# Altium PCB CEM3340.PcbDoc
Units mil, origin at the board's own origin, x right, y up, seen from the top; angles counter-clockwise.
Board outline 8400 x 5545 mil, 2 copper layers (Top Layer, Bottom Layer), stack 61.811 mil thick; 21 components, 22 nets, 63 pads, 9 vias.
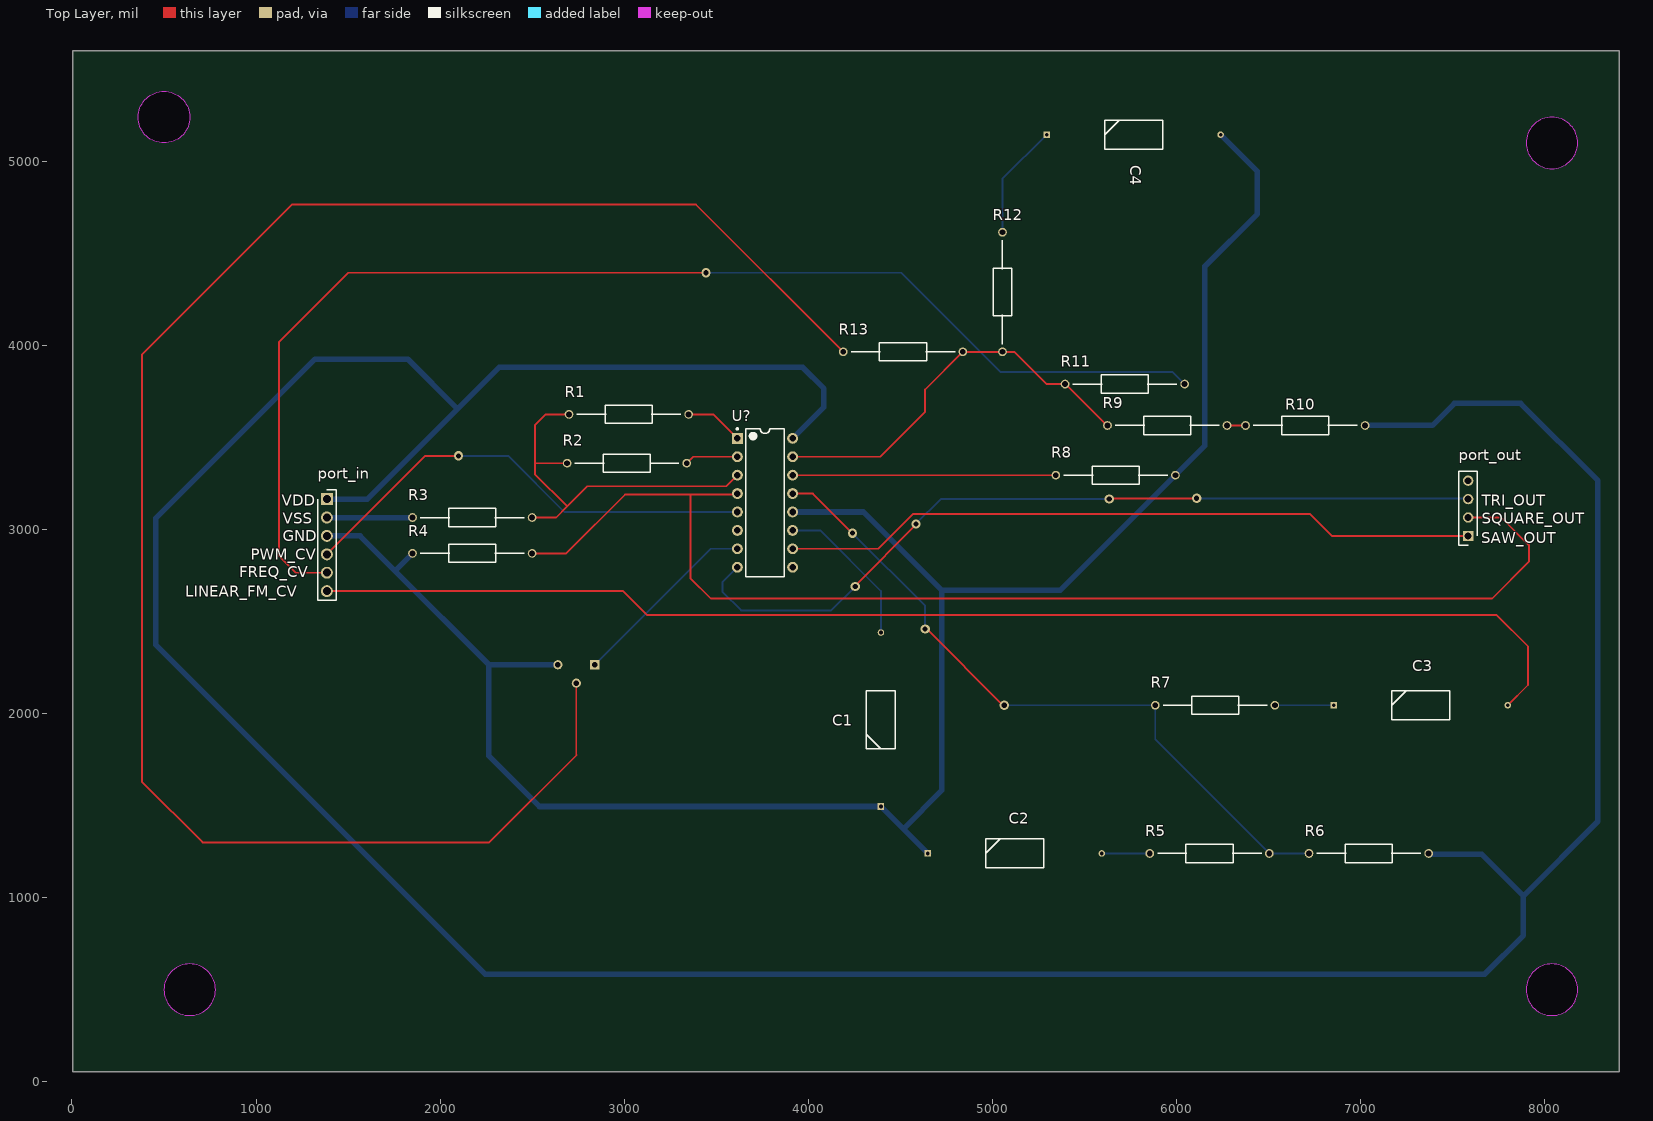
[diagram p0: Top Layer view]
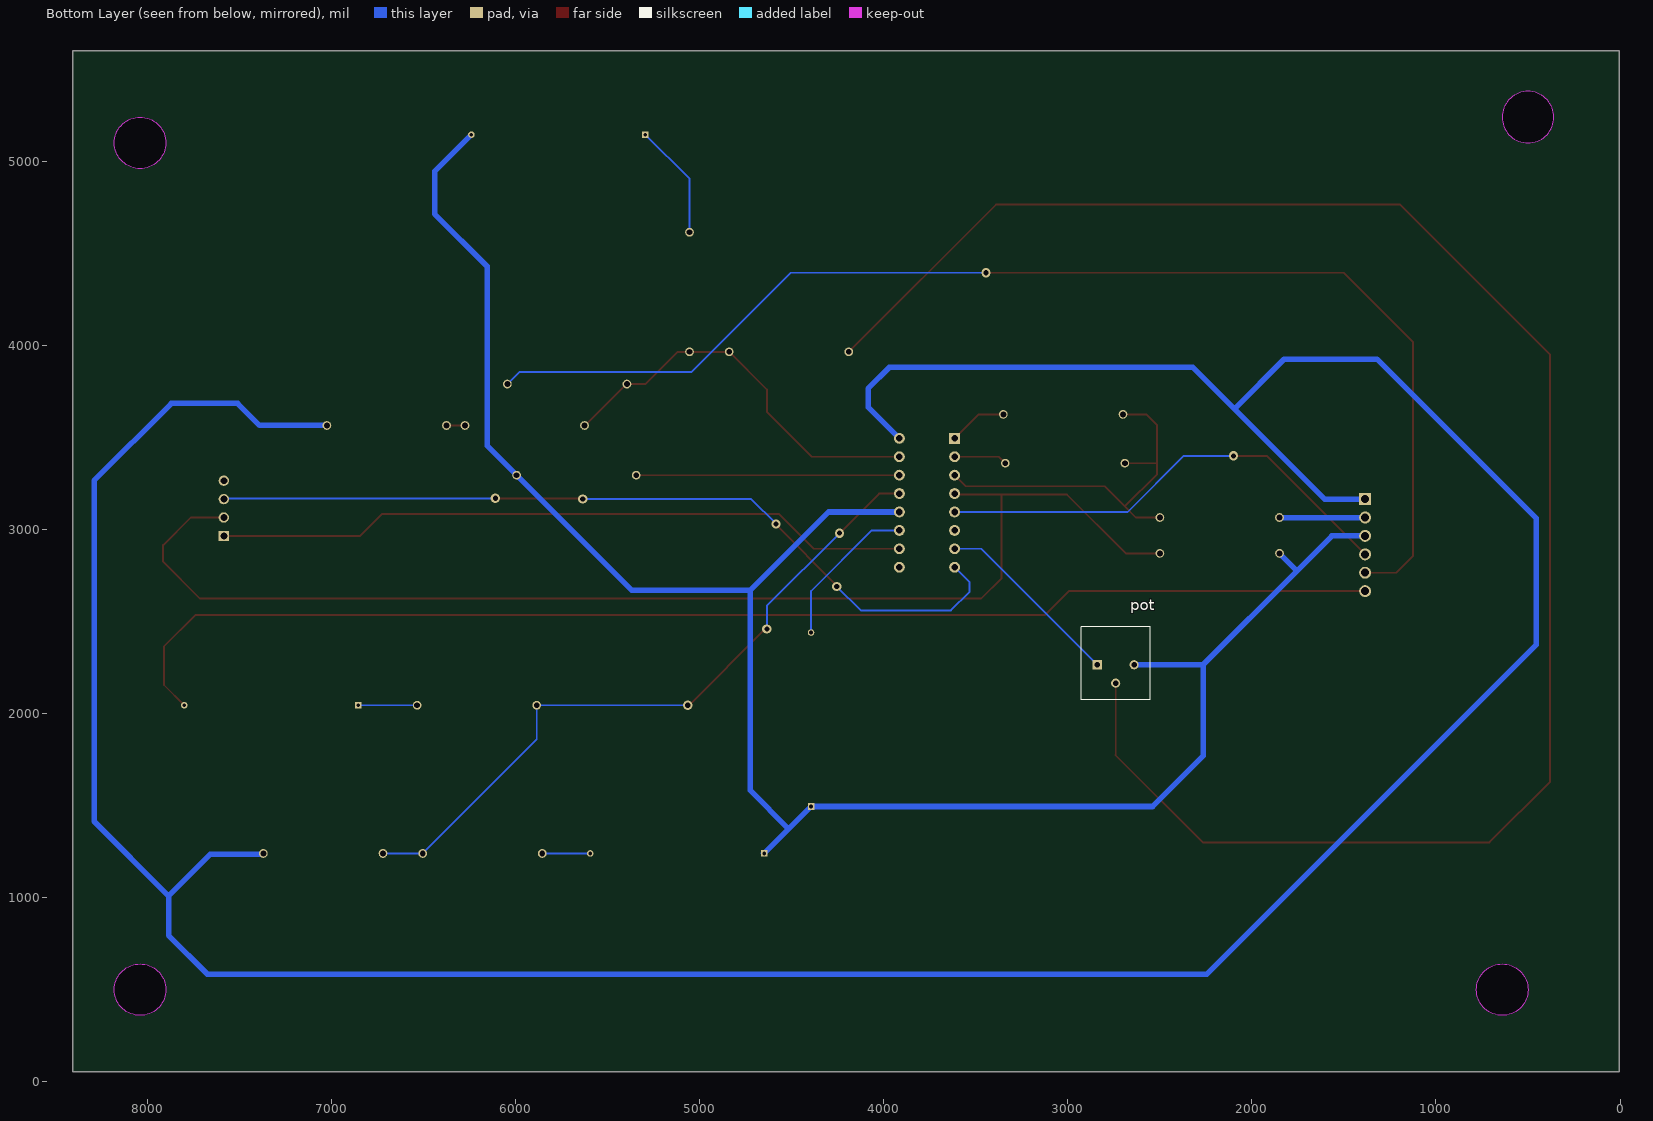
[diagram p1: Bottom Layer view, seen from below]
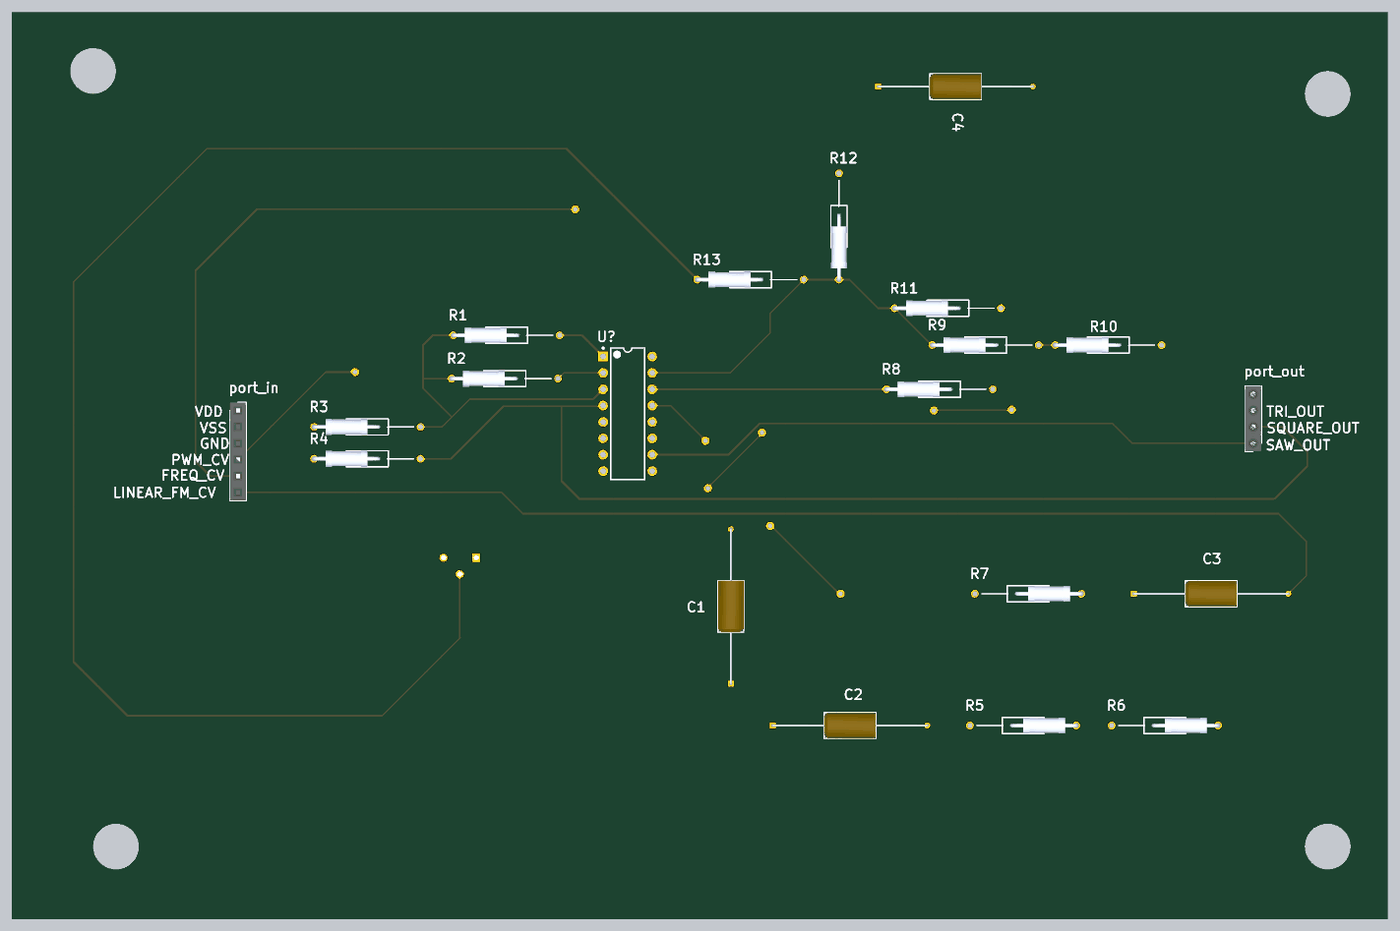
[diagram p2: 3D render of the assembled board from above, using the file's embedded part models]

## Layer stack, top to bottom
Top Solder: solder mask 0.5, Solder Resist, Dk 3.5
Top Layer: signal copper 1.378
Dielectric 1: dielectric 59.055, FR-4, Dk 4.5
Bottom Layer: signal copper 1.378
Bottom Solder: solder mask 0.5, Solder Resist, Dk 3.5

## Board outline
5,55 5,5600 8405,5600 8405,55
cut-out: 7900,500 ccw(c8040,500) 8040,360 ccw(c8040,500) 8180,500 ccw(c8040,500) 8040,640 ccw(c8040,500)
cut-out: 7900,5100 ccw(c8040,5100) 8040,4960 ccw(c8040,5100) 8180,5100 ccw(c8040,5100) 8040,5240 ccw(c8040,5100)
cut-out: 500,5100 cw(c500,5240) 360,5240 cw(c500,5240) 500,5380 cw(c500,5240) 640,5240 cw(c500,5240)
cut-out: 500,500 ccw(c640,500) 640,360 ccw(c640,500) 780,500 ccw(c640,500) 640,640 ccw(c640,500)

## Design rules (kind name [scope] priority, off if disabled: settings)
Clearance [All] p1: gap=10 ignorepadtopadclearanceinfootprint=FALSE
PolygonConnect [All] p1: connectstyle=Relief reliefconductorwidth=10 reliefentries=4 polygonreliefangle="90 Angle" airgapwidth=10
RoutingVias [All] p1: holewidth=28 width=50 viastyle="Through Hole" minholewidth=28 minwidth=50 maxholewidth=28 maxwidth=50
SolderMaskExpansion [All] p1: expansion=4 istentingtop=FALSE
SupplyNets "Schematic Supply Nets_2" [InNet('VDD')] p1: voltage=0.000
SupplyNets "Schematic Supply Nets_1" [InNet('GND')] p2: voltage=0.000
SupplyNets "Schematic Supply Nets" [InNet('VSS')] p3: voltage=0.000
Width [All] p1: maxlimit=30 minlimit=10 preferedwidth=10 minimp=50.000000 maximp=50.000000 favimp=50.000000
30 further rules are at their usual default settings.

## Classes and differential pairs
net class U?_Nets: GND NetC1_2 Netport_in_4 Netport_out_1 Netport_out_2 Netport_out_3 Netpot_1 NetR1_1 NetR1_2 NetR2_2 NetR5_1 NetR8_1 NetR9_1 NetU?_6 NetU?_9 VDD
net class R13_Nets: Netpot_2 NetR9_1
net class R12_Nets: NetC4_1 NetR9_1
net class R11_Nets: Netport_in_5 NetR9_1
net class R10_Nets: NetR9_2 VDD
net class R9_Nets: NetR9_1 NetR9_2
net class R8_Nets: GND NetR8_1
net class R7_Nets: NetC3_1 NetR5_1
net class R6_Nets: NetR5_1 VDD
net class R5_Nets: NetC2_2 NetR5_1
net class R4_Nets: GND Netport_out_2
net class R3_Nets: NetR1_1 VSS
net class R2_Nets: NetR1_1 NetR2_2
net class R1_Nets: NetR1_1 NetR1_2
net class pot_Nets: GND Netpot_1 Netpot_2
net class port_out_Nets: Netport_out_1 Netport_out_2 Netport_out_3 Netport_out_4
net class port_in_Nets: GND NetC3_2 Netport_in_4 Netport_in_5 VDD VSS
net class C4_Nets: GND NetC4_1
net class C3_Nets: NetC3_1 NetC3_2
net class C2_Nets: GND NetC2_2
net class C1_Nets: GND NetC1_2

## Components (designator, comment, footprint, x,y, rotation, side; value= is the part's Value field where it differs from the comment)
C1 "1000p" CAPPA2400W30L800D400 4395,1495.12 r90 top
C2 "0.01u" CAPPA2400W30L800D400 4650,1240 r0 top
C3 "0.1u" CAPPA2400W30L800D400 6855,2045 r0 top
C4 "0.01u" CAPPA2400W30L800D400 5295.12,5145 r0 top
port_in "929870-01-06-RA" RHDR6W64P0X254_1X6_1524X254X380P 1385,3165 r270 top
port_out "929870-01-04-RA" RHDR4W76P0X254_1X4_1016X254X826P 7585,2965 r90 top
pot "20k" 3296P1502LF 2840,2265 r0 bottom
R1 "30k" RESAD1650W60L650D250 2700.39,3625 r0 top
R2 "5.6k" RESAD1650W60L650D250 2690,3360 r0 top
R3 "830" RESAD1650W60L650D250 1850,3065 r0 top
R4 "10k" RESAD1650W60L650D250 1850,2870 r0 top
R5 "470" RESAD1650W60L650D250 6504.61,1240 r180 top
R6 "1.5M" RESAD1650W60L650D250 7370,1240 r180 top
R7 "1M" RESAD1650W60L650D250 6535,2045 r180 top
R8 "1.8k" RESAD1650W60L650D250 5345,3295 r0 top
R9 "310k" RESAD1650W60L650D250 5625.39,3565 r0 top
R10 "60k" RESAD1650W60L650D250 6375.39,3565 r0 top
R11 "100k" RESAD1650W60L650D250 5395,3790 r0 top
R12 "470" RESAD1650W60L650D250 5055,3965 r90 top
R13 "1M" RESAD1650W60L650D250 4190,3965 r0 top
U? "ADG508AKNZ" ADI-N-16 3765,3145 r0 top

## Footprints (in the part's own frame and the unit in brackets; to place one, negate y for a bottom-side part, rotate by r counter-clockwise, add the part's x,y. Pads: shape width x height; smd on the part's side, far side on the other; paste and mask are expansions set on the pad)
3296P1502LF [mm]
  rect 1.269x1.269 hole 0.74: 1(0,0)
  round 1.269 hole 0.74: 2(-2.54,2.54) 3(-5.08,0)
  silkscreen extent -7.3,-5.23 2.22,4.8, body extent -7.08,-5.26 2.45,6.29, height 3.88
ADI-N-16 [mm] "DIP, 16-Leads, Body 20.07x6.6mm, Pitch 2.54mm"
  rect 1.5x1.5 hole 0.9: 1(-3.81,8.89)
  round 1.5 hole 0.9: 2(-3.81,6.35) 3(-3.81,3.81) 4(-3.81,1.27) 5(-3.81,-1.27) 6(-3.81,-3.81) 7(-3.81,-6.35) 8(-3.81,-8.89) 9(3.81,-8.89) 10(3.81,-6.35) 11(3.81,-3.81) 12(3.81,-1.27) 13(3.81,1.27) 14(3.81,3.81) 15(3.81,6.35) 16(3.81,8.89)
  silkscreen extent -3.93,-10.2 2.65,10.31, body extent -3.95,-10.15 3.95,10.15, height 5.33
CAPPA2400W30L800D400 [mm]
  rect 0.9x0.9 hole 0.5: 1(0,0)
  round 0.9 hole 0.5: 2(24,0)
  silkscreen extent 8,-2 16,2, body extent -0.15,-2 24.15,2, height 3.99
RESAD1650W60L650D250 [mm]
  round 1.2 hole 0.8: 1(0,0) 2(16.5,0)
  silkscreen extent 1.08,-1.25 15.42,1.25, body extent -0.3,-1.25 10.3,1.25, height 2.55
RHDR4W76P0X254_1X4_1016X254X826P [mm]
  rect 1.425x1.425 hole 0.95: 1(0,0)
  round 1.425 hole 0.95: 2(2.54,0) 3(5.08,0) 4(7.62,0)
  silkscreen extent -1.27,-1.27 8.89,1.27, body extent -1.27,-1.27 8.89,1.27, height 8.26
RHDR6W64P0X254_1X6_1524X254X380P [mm]
  rect 1.65x1.65 hole 1.1: 1(0,0)
  round 1.65 hole 1.1: 2(2.54,0) 3(5.08,0) 4(7.62,0) 5(10.16,0) 6(12.7,0)
  silkscreen extent -1.27,-1.27 13.97,1.27, body extent -1.27,-1.27 13.97,1.27, height 3.8

## Part data
C1 C2 C3 C4: library part 0113207, "Capacitor", Manufacturer_Name="RS Pro", Datasheet Link=https://docs.rs-online.com/d68c/0900766b8157e121.pdf, Manufacturer_Part_Number=0113207
port_in: "Connector", Manufacturer_Name=3M, Mouser Part Number=517-929870-01-06-RA, Arrow Part Number=929870-01-06-RA, Arrow Price/Stock=https://www.arrow.com/en/products/929870-01-06-ra/3m?region=nac, Datasheet Link=https://componentsearchengine.com/Datasheets/1/929870-01-06-RA.pdf, Height=3.8mm, Manufacturer_Part_Number=929870-01-06-RA, Mouser Price/Stock=https://www.mouser.co.uk/ProductDetail/3M-Electronic-Solutions-Division/929870-01-06-RA?qs=neFkstNq%252B6F6Q7pF8hOFFA%3D%3D
port_out: "Connector", Manufacturer_Name=3M, Mouser Part Number=517-929870-01-04-RA, Arrow Part Number=929870-01-04-RA, Arrow Price/Stock=https://www.arrow.com/en/products/929870-01-04-ra/3m, Datasheet Link=https://componentsearchengine.com/Datasheets/2/929870-01-04-RA.pdf, Height=8.26mm, Manufacturer_Part_Number=929870-01-04-RA, Mouser Price/Stock=https://www.mouser.co.uk/ProductDetail/3M-Electronic-Solutions-Division/929870-01-04-RA?qs=neFkstNq%252B6GPZEKactAgTg%3D%3D
pot: library part 3296P-1-203LF, "Variable Resistor", Manufacturer_Name=Bourns, Mouser Part Number=652-3296P-1-203LF, Arrow Part Number=3296P-1-203LF, Arrow Price/Stock=https://www.arrow.com/en/products/3296p-1-203lf/bourns?region=nac, Datasheet Link=https://www.bourns.com/pdfs/3296.pdf, Height=4.96mm, Manufacturer_Part_Number=3296P-1-203LF, Mouser Price/Stock=https://www.mouser.co.uk/ProductDetail/Bourns/3296P-1-203LF?qs=2EY8XwU7iu%2FBEM7pUMj5aA%3D%3D
R1 R2 R3 R4 R5 R6 R7 R8 R9 R10 R11 R12 R13: library part MRS25000C1003FC100, "Resistor", Manufacturer_Name=Vishay, Mouser Part Number=594-MRS25000C1003FC1, Arrow Part Number=MRS25000C1003FC100, Arrow Price/Stock=https://www.arrow.com/en/products/mrs25000c1003fc100/vishay?region=nac, Datasheet Link=http://www.vishay.com/docs/28724/mrs16m25.pdf, Manufacturer_Part_Number=MRS25000C1003FC100, Mouser Price/Stock=https://www.mouser.co.uk/ProductDetail/Vishay-BC-Components/MRS25000C1003FC100?qs=H30XFsNYD%2FHyk6mBpuomxg%3D%3D
U?: library part CMP-0793-00029-1, "CMOS 8-Channel Analog Multiplexer, 280 Ohm / 500 Ohm Ron, 16-pin DIP (N-16), Tube", Manufacturer="Analog Devices", Code_JEDEC=MS-001, ComponentLink1Description="Manufacturer URL", ComponentLink1URL=http://www.analog.com/en/index.html, ComponentLink2Description=Datasheet, ComponentLink2URL=http://www.analog.com/static/imported-files/data_sheets/ADG508A_509A.pdf, ComponentLink3Description="Package Specification", ComponentLink3URL=http://www.analog.com/static/imported-files/packages/44768431550332N_16.pdf, DatasheetVersion="Rev. D", Max Analog Signal Range="Vss to Vdd", Mounting Technology="Through Hole", PackageDescription="16-Pin Plastic Dual In-Line Package, Row spacing 7.62 mm, Pitch 2.54 mm", PackageReference=N-16, PackageVersion="070706-A, 07/2006", Packing=Tube, PartNumber=ADG508AKNZ, Ron (ohms)=280, t transition (s)=200n

## Via types
v1: diameter 50, hole 28, Top Layer to Bottom Layer, 9 vias

## Nets (pads, with @x,y where several pads share a name; then routed paths per layer and width w, separated by ;. In a path a pad name is that pad's centre, name@x,y a point inside that pad or via, vN(x,y) a via of type N, cw(c..) or ccw(c..) an arc to the next point about the centre after c; other vN are vias at no path point)
GND: C1.1 C2.1 C4.2 port_in.3 pot.3 R4.1 R8.2 U?.12 | length 10812.8
  Bottom Layer w10: 1752.5,2777.5 1757.5,2777.5 ; 4516.2,1373.8 4516.2,1373.92 ; C2.1@4652.4,1252.72 C2.1@4665.12,1240
  Bottom Layer w30: port_in.3 1565,2965 1752.5,2777.5 2265,2265 ; 1757.5,2777.5 R4.1 ; pot.3 2265,2265 ; U?.12 4300,3095 4725,2670 ; 4516.2,1373.8 C2.1 ; C4.2 6440,4945 6440,4715 6155,4430 6155,3455.39 R8.2 5369.61,2670 4725,2670 ; 2265,2265 2265,1770 2539.88,1495.12 C1.1 4516.2,1373.92 4725,1582.72 4725,2670
NetC1_2: C1.2 U?.11 | length 841.7
  Bottom Layer w10: U?.11 4065,2995 4395,2665 C1.2
NetC2_2: C2.2 R5.2 | length 245
  Bottom Layer w10: C2.2@5610,1240 R5.2
NetC3_1: C3.1 R7.1 | length 320
  Bottom Layer w10: R7.1 C3.1
NetC3_2: C3.2 port_in.6 | length 7014.9
  Top Layer w10: port_in.6 2995,2665 3125,2535 3255,2535 7740,2535 7910,2365 7910,2155.12 C3.2
NetC4_1: C4.1 R12.2 | length 629.9
  Bottom Layer w10: R12.2 5055,4904.88 C4.1
Netport_in_4: port_in.4 U?.5 | length 2577.9
  Top Layer w10: port_in.4 1920,3400 v1(2100,3400)
  Bottom Layer w10: v1(2100,3400) 2370,3400 2675,3095 U?.5
Netport_in_5: port_in.5 R11.2 | length 6787.8
  Top Layer w10: port_in.5 1215,2765 1125,2855 1125,4020 1500,4395 3444.09,4395 v1(3444.72,4394.38)
  Bottom Layer w10: v1(3444.72,4394.38) 4505.62,4394.38 5045,3855 5979.61,3855 R11.2
Netport_out_1: port_out.1 U?.10 | length 3798.4
  Top Layer w10: U?.10 4380,2895 4570,3085 6725,3085 6845,2965 port_out.1
Netport_out_2: port_out.2 R4.2 U?.4 | length 6870.6
  Top Layer w10: R4.2 2685,2870 3005,3190 3360,3190 ; U?.4 3610,3190 3360,3190 ; port_out.2 7765,3065 7915,2915 7915,2825 7715,2625 3470,2625 3360,2735 3360,3190
Netport_out_3: port_out.3 U?.8 | length 4520.2
  Top Layer w10: v1(4255,2690) 4255,2695 4585,3025 v1(4585,3030) ; v1(5635,3165) 5637.5,3167.5 6107.5,3167.5 v1(6110,3170)
  Bottom Layer w10: U?.8 3535,2715 3535,2660 3635,2560 4125,2560 v1(4255,2690) ; v1(4585,3030) 4720,3165 v1(5635,3165) ; v1(6110,3170) 6112.5,3167.5 7582.5,3167.5 port_out.3
Netpot_1: pot.1 U?.7 | length 1036
  Bottom Layer w10: pot.1 3470,2895 U?.7
Netpot_2: pot.2 R13.1 | length 9884.1
  Top Layer w10: pot.2 2740,1775 2740.86,1774.14 2266.72,1300 710,1300 380,1630 380,3950 1195,4765 3390,4765 R13.1
NetR1_1: R1.1 R2.1 R3.2 U?.3 | length 2115.3
  Top Layer w10: R3.2 2630,3065 2690,3125 ; R2.1 2515,3360 ; R1.1@2707.33,3625 2575,3625 2515,3565 2515,3360 ; U?.3 3555,3235 2800,3235 2690,3125 ; 2515,3360 2515,3300 2690,3125
NetR1_2: R1.2 U?.1 | length 318.8
  Top Layer w10: R1.2 3485,3625 U?.1
NetR2_2: R2.2 U?.2 | length 289.9
  Top Layer w10: R2.2 3374.61,3395 U?.2
NetR5_1: R5.1 R6.2 R7.2 U?.13 | length 3797.2
  Top Layer w10: U?.13 4025,3195 v1(4240,2980) ; v1(4635,2460) 4642.5,2460 5057.5,2045 v1(5065,2045)
  Bottom Layer w10: v1(4240,2980) 4635,2585 v1(4635,2460) ; v1(5065,2045) R7.2 5885.39,1859.21 R5.1 R6.2
NetR8_1: R8.1 U?.14 | length 1430
  Top Layer w10: U?.14 R8.1
NetR9_1: R9.1 R11.1 R12.1 R13.2 U?.15 | length 2182.7
  Top Layer w10: U?.15 4390,3395 4635,3640 4635,3760.39 R13.2 R12.1 5120,3965 5295,3790 R11.1 5397.7,3790 5622.7,3565 R9.1
NetR9_2: R9.2 R10.1 | length 100.4
  Top Layer w10: R9.2 R10.1
VDD: port_in.1 R6.1 R10.2 U?.16 | length 19185.2
  Bottom Layer w10: 1842.5,3412.5 1852.5,3412.5 ; R6.1 R6.1@7375,1235
  Bottom Layer w30: port_in.1 1605,3165 1852.5,3412.5 2095,3655 ; U?.16 4085,3665 4085,3765 3970,3880 2320,3880 2095,3655 ; R10.2 7390,3565 7510,3685 7870,3685 8290,3265 8290,1415 7885,1010 ; R6.1@7375,1235 7660,1235 7885,1010 ; 2095,3655 1824.14,3925.86 1320.86,3925.86 455,3060 455,2375 2245,585 7675,585 7885,795 7885,1010
VSS: port_in.2 R3.1 | length 465
  Bottom Layer w30: port_in.2 R3.1
pads on no net: port_out.4 U?.6 U?.9

## Silkscreen, mask and mechanical layers (free items; w line width, h text height)
Top Overlay:
  text "VDD" at 1140.05,3130 h60
  text "TRI_OUT" at 7660,3130 h60
  text "VSS" at 1145,3030 h60
  text "SQUARE_OUT" at 7660,3030 h60
  text "GND" at 1145,2935 h60
  text "SAW_OUT" at 7655,2925 h60
  text "PWM_CV" at 970,2835 h60
  text "FREQ_CV" at 910,2740 h60
  text "LINEAR_FM_CV" at 615,2635 h60
Mechanical 1:
  the board outline again, w10